# EAGLE board ApplicationShield (EAGLE 7.3.0)
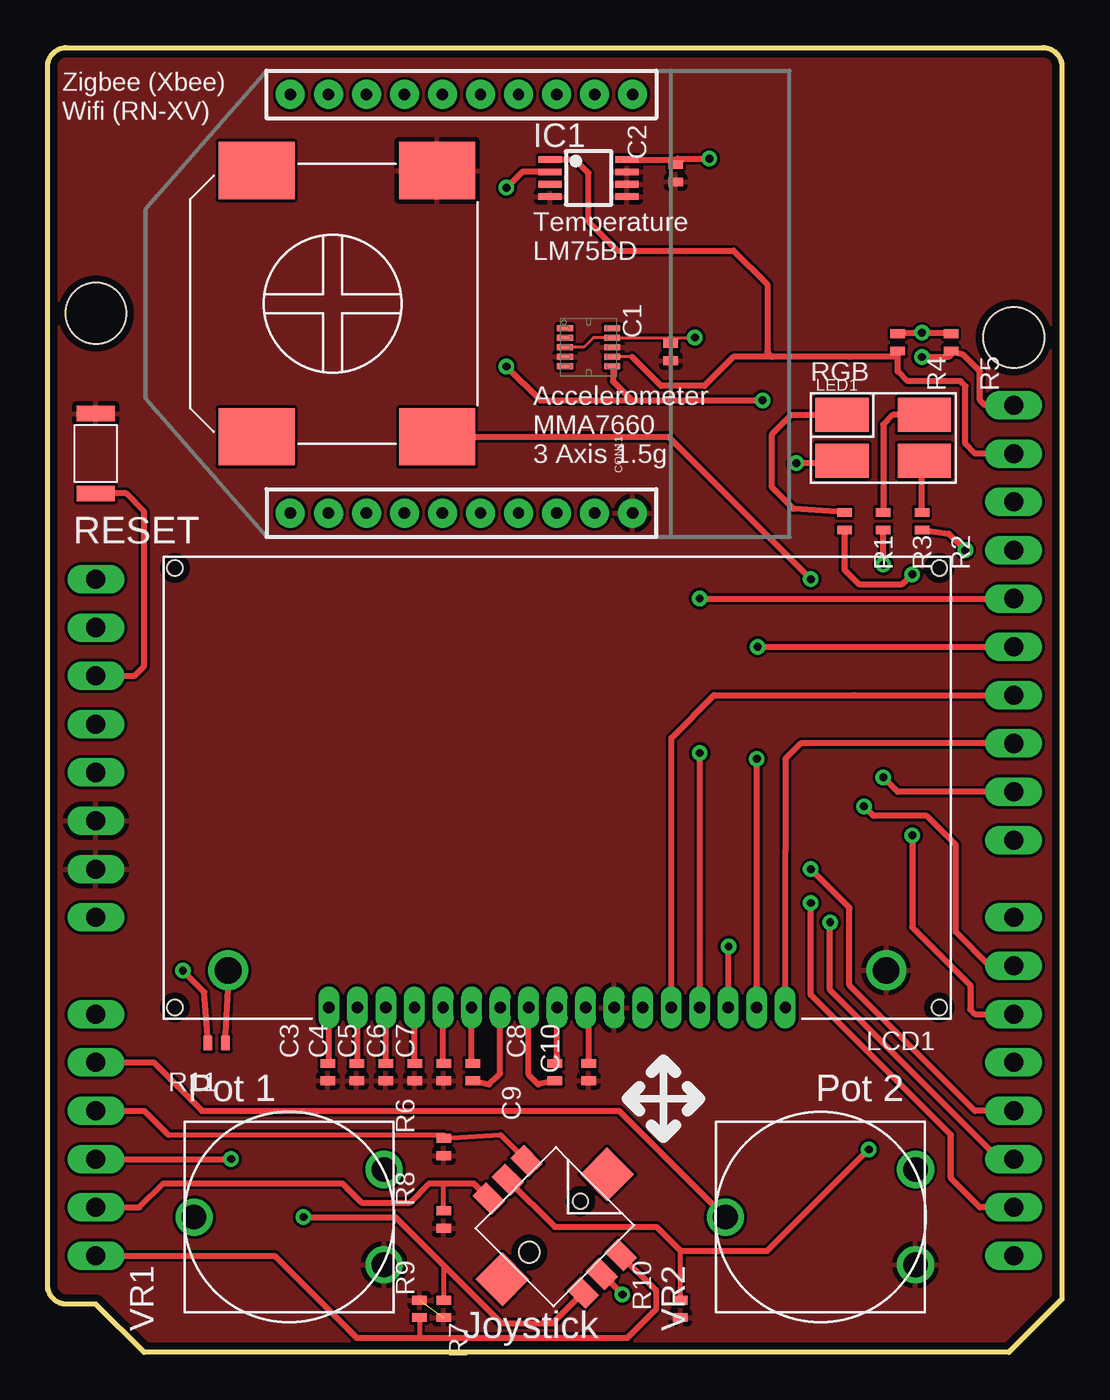
[diagram p0: board, top side]
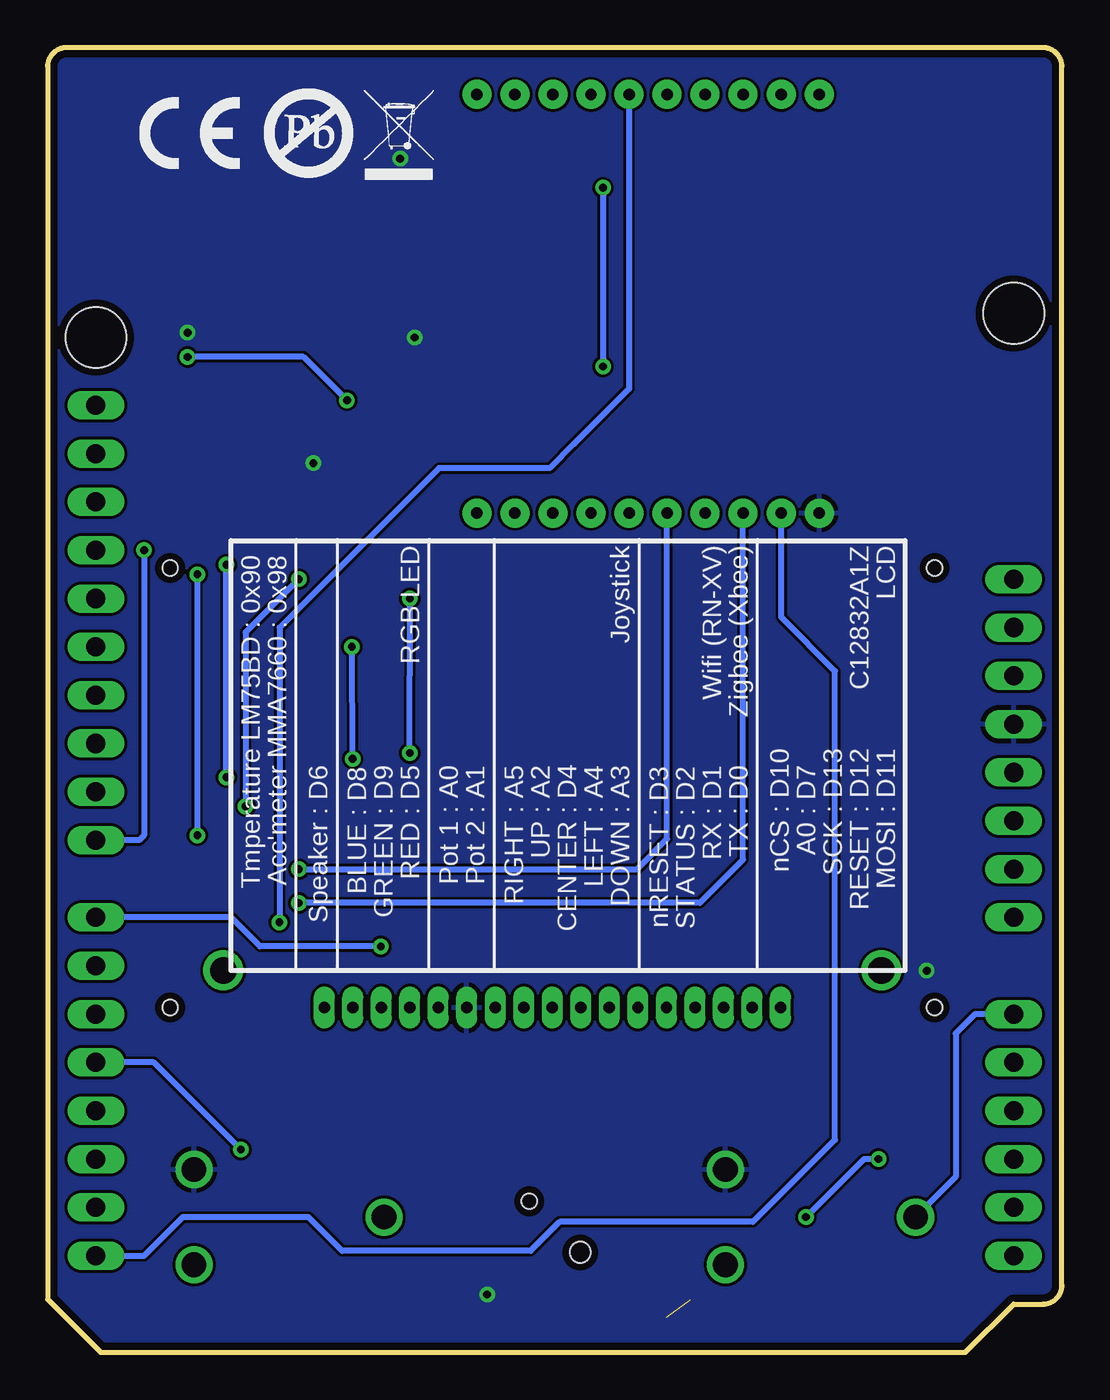
[diagram p1: board, bottom side, seen from below]

Size 53.34 x 68.58 mm. Coordinates in mm from the lower left corner, seen from the top.
Copper layers (1*16): Top 0.035mm / dielectric 1.5mm / Bottom 0.035mm
Design rules "mbed-HDK-6-6": minimum track width 6mil, minimum drill 15mil, track to track 6mil, track to pad 6mil, pad to pad 6mil, via to via 6mil, smd to smd 6mil, copper to edge 15mil, drill to drill 8mil, minimum pad ring 10mil, minimum via ring 8mil, stop-mask expansion 4mil, vias tented up to drill 0mil, thermal gap 10mil

## Footprints (pad centres in the part's own frame; a part is rotated, then mirrored left to right if it is on the bottom)
ARDUINO_R3_APPS_SHEILD = drill 1 long: P$1 27.94,2.54; P$2 30.48,2.54; P$3 33.02,2.54; P$4 35.56,2.54; P$5 38.1,2.54; P$6 40.64,2.54; P$7 43.18,2.54; P$8 45.72,2.54; P$9 50.8,2.54; P$10 53.34,2.54; P$11 55.88,2.54; P$12 58.42,2.54; P$13 60.96,2.54; P$14 63.5,2.54; P$15 63.5,50.8; P$16 60.96,50.8; P$17 58.42,50.8; P$18 55.88,50.8; P$19 53.34,50.8; P$20 50.8,50.8; P$21 48.26,50.8; P$22 45.72,50.8; P$23 41.656,50.8; P$24 39.116,50.8; P$25 36.576,50.8; P$26 34.036,50.8; P$27 31.496,50.8; P$28 28.956,50.8; P$29 26.416,50.8; P$30 23.876,50.8; P$31 21.336,50.8; P$32 18.796,50.8 | hole 3.2: 15.24,50.8; 13.97,2.54
0402 = smd 0.457 x 0.762: 1 -0.457,0; 2 0.457,0
XBEE-SILK = drill 0.6 pad 1.524: 1 -11,20; 2 -11,18; 3 -11,16; 4 -11,14; 5 -11,12; 6 -11,10; 7 -11,8; 8 -11,6; 9 -11,4; 10 -11,2; 11 11,2; 12 11,4; 13 11,6; 14 11,8; 15 11,10; 16 11,12; 17 11,14; 18 11,16; 19 11,18; 20 11,20
TSSOP8 = smd 1.2 x 0.35: 1 -2.025,0.975; 2 -2.025,0.325; 3 -2.025,-0.325; 4 -2.025,-0.975; 5 2.025,-0.975; 6 2.025,-0.325; 7 2.025,0.325; 8 2.025,0.975
DFN10-3X3MM = smd 0.825 x 0.3: P$1 -1.24,1; P$2 -1.24,0.5; P$3 -1.24,0; P$4 -1.24,-0.5; P$5 -1.24,-1; P$6 1.24,-1; P$7 1.24,-0.5; P$8 1.24,0; P$9 1.24,0.5; P$10 1.24,1
C12832A1Z = drill 1.4: A 3.4,2.55; K 38,2.55 | drill 0.6 long: P$1 8.7,0.6; P$2 10.2,0.6; P$3 11.7,0.6; P$4 13.2,0.6; P$5 14.7,0.6; P$6 16.2,0.6; P$7 17.7,0.6; P$8 19.2,0.6; P$9 20.7,0.6; P$10 22.2,0.6; P$11 23.7,0.6; P$12 25.2,0.6; P$13 26.7,0.6; P$14 28.2,0.6; P$15 29.7,0.6; P$16 31.2,0.6; P$17 32.7,0.6 | hole 0.8: 0.6,0.6; 40.8,0.6; 40.8,23.7; 0.6,23.7
PLCC-4 = smd 2.794 x 1.778: 1 -2.159,1.27; 2 -2.159,-1.143; 3 2.159,-1.143; 4 2.159,1.27
SMS-1508MS-R = smd 3 x 4: + -7,-5.5; - 7,-5.5; P$3 7,4; P$4 -7,4
SKRKAEE010 = smd 0.8 x 2: P$1 -2.1,0; P$2 2.1,0
SKRHA_SERIES = smd 1.4 x 1: P$1 -3.5,-1.4; P$2 -3.5,0; P$3 -3.5,1.4; P$4 3.5,-1.4; P$5 3.5,0; P$6 3.5,1.4 | smd 2 x 2: P$7 0,3.9; P$8 0,-3.9 | hole 0.8: 0,1.9 | hole 1.1: 0,-1.9
CA14V = drill 1.3: P$1 -2.5,-5; P$2 0,5; P$3 2.5,-5

## Placement (x,y rotation side)
BRD1  ARDUINO_R3_APPS  [ARDUINO_R3_APPS_SHEILD]  0,68.58 270 top
C1  100nF  [0402]  32.77,52.58 270 top
C2  100nF  [0402]  33.02,61.98 270 top
C3  100nF  [0402]  14.73,14.73 270 top
C4  100nF  [0402]  16.26,14.73 270 top
C5  100nF  [0402]  17.78,14.73 270 top
C6  100nF  [0402]  19.3,14.73 270 top
C7  100nF  [0402]  20.83,14.73 270 top
C8  100nF  [0402]  26.67,14.73 270 top
C9  100nF  [0402]  22.35,14.73 90 top
C10  100nF  [0402]  28.45,14.73 270 top
CON11  XBEE-1B2  [XBEE-SILK]  32.77,55.12 90 top
IC1  LM75BD_TSSOP8  [TSSOP8]  28.45,61.72 0 top
IC2  MMA7660FC  [DFN10-3X3MM]  28.45,52.83 0 top
LCD1  C12832A1Z  [C12832A1Z]  6.1,17.53 0 top
LED1  CLV1A-FKB  [PLCC-4]  43.94,48.01 0 top
R1  1k  [0402]  41.91,43.69 90 top
R2  1k  [0402]  45.97,43.69 90 top
R3  1k  [0402]  43.94,43.69 90 top
R4  4k7  [0402]  44.7,53.09 90 top
R5  4k7  [0402]  47.5,53.09 90 top
R6  4k7  [0402]  20.83,10.79 270 top
R7  4k7  [0402]  19.56,2.29 90 top
R8  4k7  [0402]  20.83,6.99 270 top
R9  4k7  [0402]  20.83,2.29 270 top
R10  4k7  [0402]  33.27,2.29 270 top
R11  220R  [0402]  8.89,16.26 0 top
SPK1  SMS-1508MS  [SMS-1508MS-R]  14.99,55.12 90 top
SS1  PB-MARK  [PB-MARK-0.2]  42.04,61.59 0 bottom
SS2  CE-MARK  [CE-MARK-0.2]  48.77,61.98 0 bottom
SS3  WEEE-MARK  [WEEE-MARK-0.2]  36.96,61.34 0 bottom
SW1  SPST_SKRKAWW010  [SKRKAEE010]  2.54,47.24 270 top
SW2  ALPS_NAVSWITCH  [SKRHA_SERIES]  26.67,6.6 315 top
VR1  ISKRA_PNZ  [CA14V]  12.7,7.11 90 top
VR2  ISKRA_PNZ  [CA14V]  40.64,7.11 90 top

## Library data of the parts
BRD1 CON11 IC1 IC2 LCD1 LED1 SPK1 SS1-SS3 SW2 VR1 VR2 = ApplicationShield
C1-C10 R1-R11 SW1 = mbed-HDK

## Nets
+3.3V: BRD1.P$4 C1.1 C2.1 CON11.1 IC1.8 IC2.P$3 IC2.P$9 LCD1.P$12 LED1.2 R4.2 R5.2 R11.1 SW2.P$5 VR1.P$3 VR2.P$3
GND: BRD1.P$6 BRD1.P$7 C1.2 C2.2 C3.2 C4.2 C5.2 C6.2 C7.2 C10.2 CON11.10 IC1.4 IC1.5 IC1.6 IC1.7 IC2.P$4 IC2.P$8 LCD1.K LCD1.P$11 R6.2 R7.2 R8.2 R9.2 R10.2 SPK1.- SW1.P$1 VR1.P$1 VR2.P$1
LCD_A0: BRD1.P$22 LCD1.P$15
LCD_CS_N: BRD1.P$25 LCD1.P$17
LCD_MOSI: BRD1.P$26 LCD1.P$13
LCD_RESET: BRD1.P$27 LCD1.P$16
LCD_SCK: BRD1.P$28 LCD1.P$14
LED_BLUE: BRD1.P$23 R2.1
LED_GREEN: BRD1.P$24 R3.1
LED_RED: BRD1.P$20 R1.1
N$1: LCD1.A R11.2
N$7: C8.1 LCD1.P$9
N$8: C8.2 LCD1.P$8
N$9: C9.1 LCD1.P$7
N$10: C9.2 LCD1.P$6
N$11: C3.1 LCD1.P$1
N$12: C4.1 LCD1.P$2
N$14: C5.1 LCD1.P$3
N$15: C6.1 LCD1.P$4
N$16: C7.1 LCD1.P$5
N$17: LED1.1 R1.2
N$18: C10.1 LCD1.P$10
N$19: LED1.4 R3.2
N$20: LED1.3 R2.2
NRESET: BRD1.P$3 SW1.P$2
POT_1: BRD1.P$9 VR1.P$2
POT_2: BRD1.P$10 VR2.P$2
SCL: BRD1.P$32 IC1.2 IC2.P$6 R5.1
SDA: BRD1.P$31 IC1.1 IC2.P$7 R4.1
SPEAKER: BRD1.P$21 SPK1.+
SW_CENTER: BRD1.P$19 R10.1 SW2.P$2
SW_DOWN: BRD1.P$12 R9.1 SW2.P$4
SW_LEFT: BRD1.P$13 R8.1 SW2.P$1
SW_RIGHT: BRD1.P$14 R7.1 SW2.P$6
SW_UP: BRD1.P$11 R6.1 SW2.P$3
XBEE_NRST: BRD1.P$18 CON11.5
XBEE_RX: BRD1.P$16 CON11.3
XBEE_STATUS: BRD1.P$17 CON11.15
XBEE_TX: BRD1.P$15 CON11.2

## Tracks (layer width: path | path; a pad name or v marks a point on that pad's centre or on a via)
+3.3V  (via drill 0.41)
  Top 0.152: v34.04,53.34 32.88,53.34 C1.1 arc90 32.66,53.33 IC2.P$9 28.7,53.34 28.19,52.83 IC2.P$3
  Top 0.305: LED1.2 41.66,46.74 v39.37,46.74 | R4.2 44.85,53.59 v45.97,53.59 47.36,53.59 R5.2 | R11.1 8.24,18.94 v7.11,20.07 | SW2.P$5 | SW2.P$5 v30.23,3.05 | IC1.8 32.95,62.7 C2.1 33.13,62.74 v34.8,62.74
  pour Bottom: 0,0 54.1,0 54.1,69.09 0,69.09
GND  (1 unrouted)
  pour Top: 0,0 54.1,0 54.1,69.09 0,69.09
LCD_A0  (via drill 0.41)
  Top 0.305: LCD1.P$15 35.81,18.14 35.81,21.08 v35.81,21.34
  Bottom 0.305: v35.81,21.34 42.16,21.34 43.69,22.86 BRD1.P$22
LCD_CS_N
  Top 0.305: LCD1.P$17 38.8,26.35 38.8,31.18 38.86,31.24 39.62,32 BRD1.P$25
LCD_MOSI
  Top 0.305: LCD1.P$13 32.8,32.29 35.05,34.54 42.42,34.54 BRD1.P$26
LCD_RESET  (via drill 0.41)
  Top 0.305: LCD1.P$16 v37.3,31.2 | v37.34,37.08 BRD1.P$27
  Bottom 0.305: v37.3,31.2 v37.34,37.08
LCD_SCK  (via drill 0.41)
  Top 0.305: LCD1.P$14 v34.3,31.5 | v34.29,39.62 BRD1.P$28
  Bottom 0.305: v34.3,31.5 v34.29,39.62
LED_BLUE  (via drill 0.41)
  Top 0.305: R2.1 47.39,43.04 v48.26,42.16
  Bottom 0.305: v48.26,42.16 48.26,27.18 48.51,26.92 BRD1.P$23
LED_GREEN  (via drill 0.41)
  Top 0.305: BRD1.P$24 44.7,29.46 v43.94,30.23 | v43.94,41.4 R3.1
  Bottom 0.305: v43.94,30.23 v43.94,41.4
LED_RED  (via drill 0.41)
  Top 0.305: R1.1 41.91,41.15 42.67,40.39 44.96,40.39 v45.47,40.89 | v45.47,27.18 45.47,22.35 47.5,20.32 48.51,19.3 48.51,18.03 48.77,17.78 BRD1.P$20
  Bottom 0.305: v45.47,40.89 45.47,28.45 v45.47,27.18
N$1
  Top 0.305: R11.2 9.54,20.03 LCD1.A
N$7
  Top 0.305: C8.1 26.8,15.51 LCD1.P$9
N$8
  Top 0.305: C8.2 25.8,14.08 25.4,14.48 25.3,14.58 LCD1.P$8
N$9
  Top 0.305: C9.1 23.23,14.08 23.62,14.48 23.8,14.65 LCD1.P$7
N$10
  Top 0.305: C9.2 22.3,15.38 LCD1.P$6
N$11
  Top 0.305: C3.1 14.8,15.38 LCD1.P$1
N$12
  Top 0.305: C4.1 16.3,15.38 LCD1.P$2
N$14
  Top 0.305: C5.1 17.8,15.38 LCD1.P$3
N$15
  Top 0.305: C6.1 19.3,15.38 LCD1.P$4
N$16
  Top 0.305: C7.1 20.8,15.38 LCD1.P$5
N$17
  Top 0.305: R1.2 39.23,44.34 38.1,45.47 38.1,48.26 38.86,49.02 39.12,49.28 LED1.1
N$18
  Top 0.305: LCD1.P$10 28.45,17.97 C10.1
N$19
  Top 0.305: LED1.4 44.45,49.28 43.94,48.77 R3.2
N$20
  Top 0.305: R2.2 45.97,46.74 LED1.3
NRESET
  Top 0.305: BRD1.P$3 4.57,35.56 5.08,36.07 5.08,44.2 4.13,45.14 SW1.P$2
POT_1
  Bottom 0.305: BRD1.P$9 4.57,17.78 5.59,16.76 5.59,9.22 VR1.P$2
POT_2
  Top 0.305: BRD1.P$10 5.59,15.24 8.13,12.7 30.05,12.7 VR2.P$2
SCL  (via drill 0.41)
  Top 0.305: BRD1.P$32 49.28,49.78 49.02,50.04 49.02,51.56 48.26,52.32 48.15,52.44 R5.1 arc-90 47.39,52.32 v45.97,52.32 | IC2.P$6 29.72,51.8 29.72,51.05 30.61,50.16 | 30.61,50.16 30.73,50.04 v37.59,50.04 | IC1.2 24.96,62.05 v24.13,61.21 | v24.13,51.82 25.91,50.04 30.48,50.04 30.61,50.16
  Bottom 0.305: v37.59,50.04 39.88,52.32 v45.97,52.32 | v24.13,61.21 v24.13,51.82
SDA
  Top 0.152: 30.73,52.32 IC2.P$7
  Top 0.305: BRD1.P$31 48.77,47.24 48.26,47.75 48.26,50.8 48.01,51.05 45.21,51.05 44.7,51.56 R4.1 44.59,52.32 42.16,52.32 38.1,52.32 | 38.1,52.32 36.07,52.32 34.54,50.8 32.26,50.8 30.73,52.32 | 38.1,52.32 37.85,52.58 37.85,56.13 36.07,57.91 29.97,57.91 28.45,59.44 28.45,61.98 27.94,62.48 27.73,62.7 IC1.1
SPEAKER  (via drill 0.41)
  Top 0.305: SPK1.+ 32.65,48.12 v40.13,40.64 | BRD1.P$21 49.53,20.32 47.75,22.1 47.75,26.67 46.23,28.19 43.43,28.19 v42.93,28.7
  Bottom 0.305: v40.13,40.64 42.93,37.85 v42.93,28.7
SW_CENTER  (via drill 0.41)
  Top 0.254: R10.1 33.27,5.33
  Top 0.305: SW2.P$2 26.67,6.6 32,6.6 33.27,5.33 37.85,5.33 v43.18,10.67
  Bottom 0.305: v43.18,10.67 47.75,15.24 BRD1.P$19
SW_DOWN  (via drill 0.41)
  Top 0.254: 20.83,4.57 R9.1
  Top 0.305: BRD1.P$12 v9.65,10.16 | v13.46,7.11 18.29,7.11 20.83,4.57 23.88,1.52 26.54,1.52 SW2.P$4
  Bottom 0.305: v9.65,10.16 10.41,10.16 v13.46,7.11
SW_LEFT
  Top 0.254: R8.1 20.83,8.89
  Top 0.305: BRD1.P$13 4.83,7.62 6.1,8.89 15.49,8.89 16.51,7.87 19.05,7.87 20.07,8.89 20.83,8.89 22.4,8.89 SW2.P$1
SW_RIGHT
  Top 0.254: R7.1 19.56,0.76
  Top 0.305: BRD1.P$14 11.94,5.08 16.26,0.76 19.56,0.76 30.48,0.76 32,2.29 32,3.25 SW2.P$6
SW_UP
  Top 0.254: 6.35,11.43 20.83,11.43 R6.1 23.81,11.45 SW2.P$3
  Top 0.305: BRD1.P$11 5.08,12.7 5.59,12.19 6.1,11.68 6.35,11.43
XBEE_NRST  (via drill 0.41)
  Top 0.305: BRD1.P$18 48.77,12.7 42.16,19.3 42.16,23.37 v40.13,25.4
  Bottom 0.305: v40.13,25.4 22.35,25.4 20.77,26.99 CON11.5
XBEE_RX  (via drill 0.41)
  Top 0.305: BRD1.P$16 49.02,7.62 47.5,9.14 47.5,11.43 40.13,18.8 v40.13,23.62
  Bottom 0.305: v40.13,23.62 19.05,23.62 16.77,25.91 CON11.3
XBEE_STATUS  (via drill 0.41)
  Top 0.305: BRD1.P$17 50.04,10.16 42.67,17.53 41.15,19.05 v41.15,22.61
  Bottom 0.305: CON11.15 22.77,50.64 25.65,47.75 26.92,46.48 32.77,46.48 41.15,38.1 v41.15,22.61
XBEE_TX
  Bottom 0.305: BRD1.P$15 48.26,5.08 46.23,7.11 39.62,7.11 37.85,5.33 27.94,5.33 26.42,6.86 16.26,6.86 11.94,11.18 11.94,35.81 14.77,38.64 CON11.2

## Text on the board
TopSilkscreen: Zigbee (Xbee) | Wifi (RN-XV) | Temperature | LM75BD | RGB | Accelerometer | MMA7660 | 3 Axis 1.5g | RESET | Pot 1 | Pot 2 | Joystick
BottomSilkscreen: LCD | C12832A1Z | Zigbee (Xbee) | Wifi (RN-XV) | Joystick | RGB LED | Acc'meter MMA7660 : 0x98 | Tmperature LM75BD : 0x90 | MOSI : D11 | RESET : D12 | SCK : D13 | nCS : D10 | A0 : D7 | TX : D0 | RX : D1 | STATUS : D2 | nRESET : D3 | DOWN : A3 | LEFT : A4 | CENTER : D4 | UP : A2 | RIGHT : A5 | Pot 2 : A1 | Pot 1 : A0 | RED : D5 | GREEN : D9 | BLUE : D8 | Speaker : D6